# EAGLE board new_encorder_slave 100x50  (EAGLE 6.4)
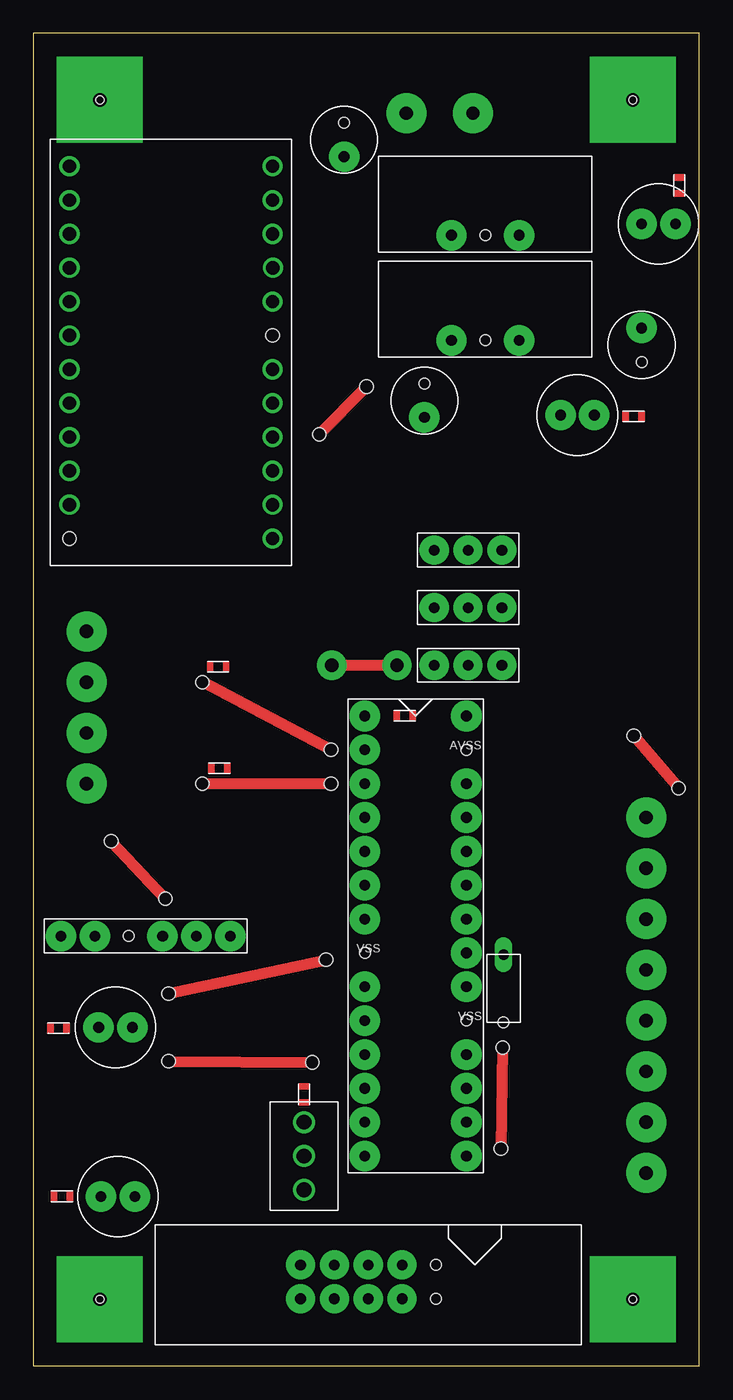
[diagram p0: board, top side]
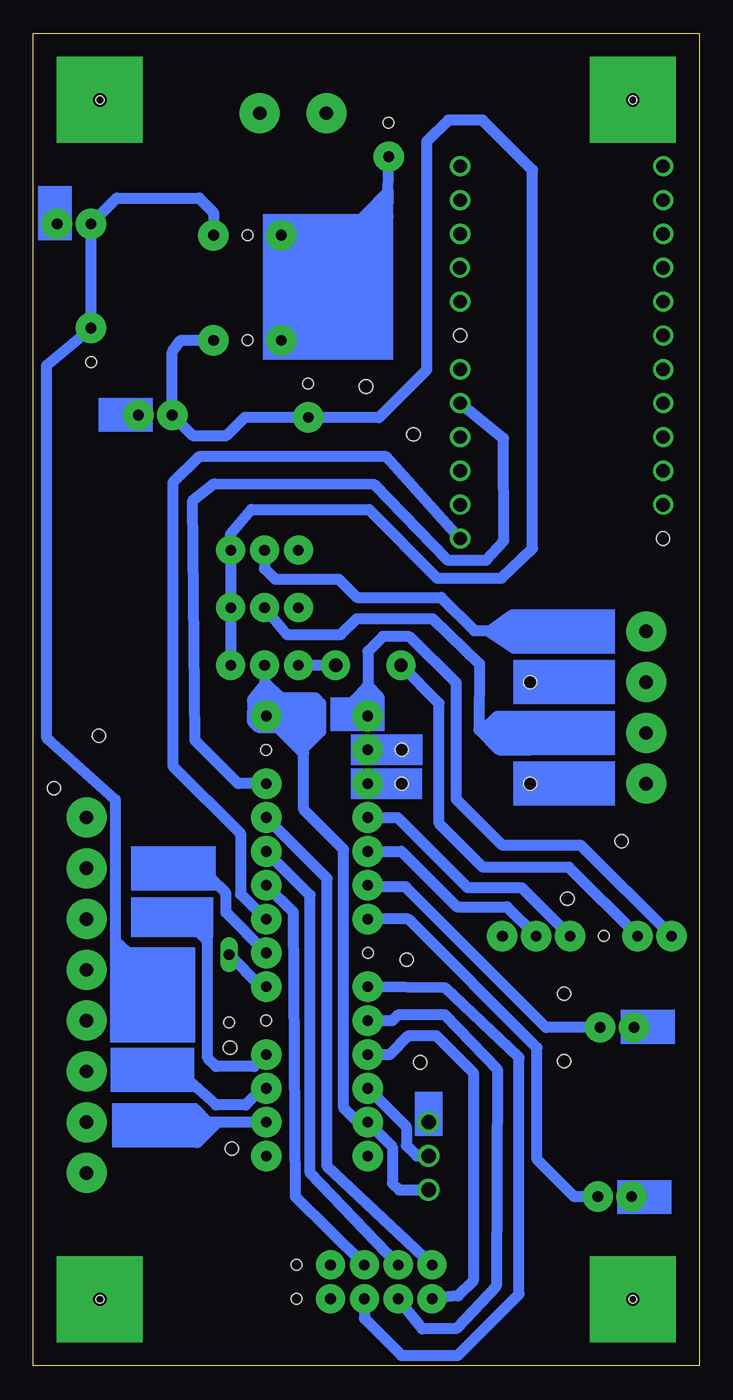
[diagram p1: board, bottom side, seen from below]

Size 50 x 100 mm. Coordinates in mm from the lower left corner, seen from the top.
Outline: 0,0 50,0 50,100 0,100 0,0
Copper layers (1*16): Top 0.035mm / dielectric 1.5mm / Bottom 0.035mm
Design rules "default": minimum track width 10mil, minimum drill 24mil, track to track 8mil, track to pad 8mil, pad to pad 8mil, via to via 8mil, smd to smd 8mil, copper to edge 40mil, drill to drill 8mil, minimum pad ring 10mil, minimum via ring 8mil, stop-mask expansion 4mil, vias tented up to drill 0mil, thermal gap 10mil
Holes 0.6 mm at 5,5 45,5 45,95 5,95
Holes 1 mm at 25.02,73.48 35.1,16.31 10.16,22.86 20.95,22.78 35.23,23.88 9.91,35.05 10.16,27.94 12.7,43.69 21.97,30.48 5.84,39.37 45.09,47.29 12.7,51.31 48.44,43.36 21.46,69.9 22.35,43.69 22.35,46.23

## Footprints (pad centres in the part's own frame; a part is rotated, then mirrored left to right if it is on the bottom)
PIC_28P_2 = drill 0.8 pad 2.3: AVDD 3.81,16.51; MCLR -3.81,16.51; RA0 -3.81,13.97; RA1 -3.81,11.43; RA2 -3.81,-3.81; RA3 -3.81,-6.35; RA4 -3.81,-8.89; RB0 -3.81,8.89; RB1 -3.81,6.35; RB2 -3.81,3.81; RB3 -3.81,1.27; RB4 -3.81,-11.43; RB5 -3.81,-16.51; RB6 3.81,-16.51; RB7 3.81,-13.97; RB8 3.81,-11.43; RB9 3.81,-8.89; RB10 3.81,-1.27; RB11 3.81,1.27; RB12 3.81,3.81; RB13 3.81,6.35; RB14 3.81,8.89; RB15 3.81,11.43; VCAP 3.81,-3.81; VDD -3.81,-13.97 | hole 0.8: -3.81,-1.27; 3.81,-6.35; 3.81,13.97
LED = drill 0.8 pad 2.286: P$1 -1.27,0; P$2 1.27,0
TOGGLE_SWITCH(3PIN) = drill 1.1: P$1 2.54,1.52; P$2 2.54,4.06; P$3 2.54,6.6
AE-UM232R = drill 1: 3LD 16.67,2.03; 3V3 16.67,17.27; CB0 16.67,27.43; CB1 16.67,24.89; CB2 1.43,2.03; CB3 16.67,14.73; CB4 1.43,4.57; CTS# 1.43,7.11; DCD# 1.4,9.65; DSR# 1.43,12.19; DTR# 1.43,27.43; PU1 16.67,12.19; PU2 16.67,9.65; RI# 1.43,17.27; RST 16.67,19.81; RTS# 1.43,24.89; RXD 1.43,19.81; TXD 1.43,29.97; USB 16.67,4.57; VCC 16.67,22.35; VCCC 16.67,7.11; VIO 1.43,22.35 | hole 1: 1.43,14.73; 16.67,29.97
RIBBON_CABLE = drill 0.8 pad 2.184: P$1 -5.08,0; P$2 -2.54,0; P$3 0,0; P$4 2.54,0; P$5 -5.08,-2.54; P$6 -2.54,-2.54; P$7 0,-2.54; P$8 2.54,-2.54 | hole 0.8: 5.08,0; 5.08,-2.54
REGULATOR = drill 0.8 pad 2.286: P$2 -2.54,1.27; P$3 2.54,1.27 | hole 0.8: 0,1.27
WRITER = drill 0.8 pad 2.286: P$1 -6.35,0; P$2 -3.81,0; P$4 1.27,0; P$5 3.81,0; P$6 6.35,0 | hole 0.8: -1.27,0
CAPACITOR_33 = drill 0.8 pad 2.286: P$1 -1.27,0 | hole 0.8: 1.27,0
CAPACITORS_106 = drill 0.8 long: P$2 -2.54,0 | hole 0.8: 2.54,0
3PINSWITCH = drill 0.8 pad 2.184: P$1 -2.54,0; P$2 0,0; P$3 2.54,0

## Placement (x,y rotation side)
DSPIC33FJ128MC1  DSPIC33FJ128MC  [PIC_28P_2]  28.7,32.26 0 top
U$1  LED  [LED]  40.84,71.35 0 top
U$2  LED  [LED]  6.17,25.4 0 top
U$3  LED  [LED]  6.35,12.7 0 top
U$4  LED  [LED]  46.94,85.7 0 top
U$6  TOGGLE_SWITCH(3PIN)  [TOGGLE_SWITCH(3PIN)]  17.78,11.68 0 top
U$7  AE-UM232R  [AE-UM232R]  19.39,92.05 180 top
U$8  RIBBON_CABLE  [RIBBON_CABLE]  25.15,7.57 0 top
U$9  REGULATOR  [REGULATOR]  33.93,83.58 0 top
U$10  REGULATOR  [REGULATOR]  33.93,75.7 0 top
U$11  WRITER  [WRITER]  8.44,32.25 0 top
U$12  CAPACITOR_33  [CAPACITOR_33]  23.33,92.01 90 top
U$13  CAPACITOR_33  [CAPACITOR_33]  45.67,76.61 270 top
U$14  CAPACITOR_33  [CAPACITOR_33]  29.36,72.44 90 top
U$15  CAPACITORS_106  [CAPACITORS_106]  35.31,28.32 270 top
U$16  CHIP_RESISTOR  [CHIP_RESISTOR]  27.88,48.78 0 top
U$17  CHIP_RESISTOR  [CHIP_RESISTOR]  13.97,44.86 0 top
U$18  CHIP_RESISTOR  [CHIP_RESISTOR]  45.07,71.25 0 top
U$19  CHIP_RESISTOR  [CHIP_RESISTOR]  48.5,88.58 90 top
U$20  CHIP_RESISTOR  [CHIP_RESISTOR]  13.87,52.45 180 top
U$21  CHIP_RESISTOR  [CHIP_RESISTOR]  1.89,25.35 0 top
U$22  CHIP_RESISTOR  [CHIP_RESISTOR]  20.32,20.37 90 top
U$23  CHIP_RESISTOR  [CHIP_RESISTOR]  2.16,12.72 0 top
U$24  3PINSWITCH  [3PINSWITCH]  32.64,52.58 0 top
U$25  3PINSWITCH  [3PINSWITCH]  32.64,61.21 0 top
U$26  3PINSWITCH  [3PINSWITCH]  32.64,56.9 0 top

## Library data of the parts
DSPIC33FJ128MC1 = N_MicroComputer
U$1-U$4 U$8-U$26 = oohira_new
U$6 U$7 = inogu

## Nets
N$6: DSPIC33FJ128MC1.RA2 U$8.P$7
N$10: DSPIC33FJ128MC1.AVDD DSPIC33FJ128MC1.VDD U$6.P$1 U$24.P$2
N$14: U$11.P$2
S$1: DSPIC33FJ128MC1.RB9
S$2: DSPIC33FJ128MC1.RB14 U$8.P$1
S$3: DSPIC33FJ128MC1.RB13 U$8.P$2
S$4: DSPIC33FJ128MC1.RB12 U$8.P$3
S$6: DSPIC33FJ128MC1.RB3 U$3.P$2
S$7: DSPIC33FJ128MC1.RB2 U$2.P$2
S$9: DSPIC33FJ128MC1.RB15 U$7.RXD
S$10: DSPIC33FJ128MC1.RB11 U$7.TXD
S$12: DSPIC33FJ128MC1.MCLR U$11.P$1
S$13: DSPIC33FJ128MC1.RB1 U$11.P$5
S$14: DSPIC33FJ128MC1.RB0 U$11.P$4
S$22: U$4.P$1 U$9.P$3 U$13.P$1
S$23: DSPIC33FJ128MC1.RB8
S$24: U$25.P$2
S$27: DSPIC33FJ128MC1.RA4 U$8.P$5
S$28: U$26.P$2
S$29: DSPIC33FJ128MC1.RA3 U$8.P$6
S$36: DSPIC33FJ128MC1.RB7
S$37: DSPIC33FJ128MC1.VCAP U$15.P$2
S$38: U$24.P$1
S$40: DSPIC33FJ128MC1.RB10
S$62: DSPIC33FJ128MC1.RB4 U$6.P$2
S$63: U$9.P$2 U$12.P$1
S$82: U$1.P$1 U$10.P$3 U$14.P$1 U$24.P$3 U$25.P$3 U$26.P$3

## Tracks (layer width: path | path; a pad name or v marks a point on that pad's centre or on a via)
N$6
  Bottom 0.813: U$8.P$7 25.15,3.56 22.38,0.79 18.14,0.79 13.54,5.38 13.54,23.14 19.05,28.36 24.87,28.42 DSPIC33FJ128MC1.RA2
N$10
  Bottom 0.813: DSPIC33FJ128MC1.VDD | DSPIC33FJ128MC1.VDD 23.04,16.43 23.04,13.72 22.53,13.2 U$6.P$1 | DSPIC33FJ128MC1.VDD 25.64,18.29 26.7,19.35 26.7,38.75 29.71,41.76 29.71,45.97 DSPIC33FJ128MC1.AVDD | DSPIC33FJ128MC1.AVDD 31.06,48.77 29.71,50.12 28.83,50.12 28.43,49.72 28.43,47.59 29.85,46.17 29.85,46.96 28.51,48.3 28.51,48.7 29.64,49.83 29.64,48.94 28.84,48.14 29.34,48.14 30.12,48.92 30.6,48.92 31.35,48.17 30.87,48.17 29.88,47.18 29.88,47.96 30.39,48.47 30.39,49.82 28.84,50.13 32.56,50.13 32.33,49.65 30.9,49.65 30.79,49.54 31.43,49.54 32.07,48.9 | U$24.P$2 32.64,48.9 DSPIC33FJ128MC1.AVDD | DSPIC33FJ128MC1.AVDD 32.51,49.13 33.42,50.07 33.53,49.99 32.64,51.14 32.51,51.2 31.5,50.24
N$14
  Bottom 0.813: U$11.P$2 9.79,37.41 16.23,37.41 19.53,40.72 19.53,49.71 22.4,52.58
S$1
  Bottom 0.813: DSPIC33FJ128MC1.RB9 33.42,22.46 36.29,22.46 36.91,23.08 36.91,32.7 37.1,32.89 37.93,32.89 36.96,31.92 36.96,31.87
S$2
  Bottom 0.813: U$8.P$1 27.94,14.96 27.94,36.58 DSPIC33FJ128MC1.RB14
S$3
  Bottom 0.813: U$8.P$2 29.21,14.48 29.21,35.31 DSPIC33FJ128MC1.RB13
S$4
  Bottom 0.813: U$8.P$3 30.33,12.7 30.48,34.04 DSPIC33FJ128MC1.RB12
S$5  (via drill 1 pad 3)
  other vias: 46,18.29
S$6
  Bottom 0.813: U$3.P$2 9.4,12.7 12.19,15.49 12.19,23.88 21.84,33.53 DSPIC33FJ128MC1.RB3
S$7
  Bottom 0.813: U$2.P$2 11.51,25.4 22.05,35.94 24.77,35.94 DSPIC33FJ128MC1.RB2
S$8
  Bottom 0.813: 24.08,48.03 24.03,50.14 24.92,51.08
S$9
  Bottom 0.813: DSPIC33FJ128MC1.RB15 34.62,43.69 37.87,46.94 38.02,64.95 36.42,66.21 24.43,66.17 18.91,60.48 15.99,60.47 14.68,61.9 14.71,69.59 U$7.RXD
S$10
  Bottom 0.813: U$7.TXD 23.5,68.22 37.57,68.22 39.52,66.27 39.52,45.03 34.44,39.95 34.44,35.41 32.56,33.53 DSPIC33FJ128MC1.RB11
S$12
  Bottom 0.813: U$11.P$1 8.9,39.06 14.78,39.06 18.24,42.52 18.24,51.26 21.77,54.72 23.76,54.74 24.89,53.62 DSPIC33FJ128MC1.MCLR
S$13
  Bottom 0.813: DSPIC33FJ128MC1.RB1 22.38,38.61 18.21,34.44 14.44,34.44 U$11.P$5
S$14
  Bottom 0.813: DSPIC33FJ128MC1.RB0 22.66,41.15 17.4,35.89 13.34,35.89 U$11.P$4
S$15  (via drill 1 pad 6.45)
  other vias: 5,95
S$16  (via drill 1 pad 6.45)
  other vias: 45,95
S$17  (via drill 1 pad 6.45)
  other vias: 5,5
S$18  (via drill 1 pad 6.45)
  other vias: 45,5
S$19
  Top 0.813: 22.35,46.23 12.7,51.31
S$20  (via drill 1 pad 3)
  other vias: 28,94
S$21  (via drill 1 pad 3)
  other vias: 33,94
S$22
  Bottom 0.813: 43.74,24.69 43.82,31.87 39.8,28.17 39.8,27.23 43.84,31.27 43.84,42.49 49.02,47.17 49.02,75.06 U$13.P$1 U$4.P$1 43.74,87.63 37.54,87.63 36.47,86.56 U$9.P$3
S$23
  Bottom 0.813: 38.6,21.66 36.28,19.57 34.05,19.57 32.79,20.83 DSPIC33FJ128MC1.RB8
S$24
  Bottom 0.813: U$25.P$2 32.64,59.83 31.85,59.04 27.08,59.04 25.71,57.67 19.39,57.67 16.9,55.18 15.23,55.18 15.08,55.03
S$25  (via drill 1 pad 2.18)
  other vias: 22.4,52.58 27.3,52.58
S$26
  Top 0.813: 12.7,43.69 22.35,43.69
S$27
  Bottom 0.813: DSPIC33FJ128MC1.RA4 23.24,23.37 21.82,24.79 19.76,24.79 16.97,22 16.97,6.38 18.11,5.24 20.02,5.08 U$8.P$5
S$28
  Bottom 0.813: U$26.P$2 30.93,54.86 26.92,54.86 25.7,56.07 20.03,56.08 16.5,52.67 16.56,47.75 15.04,46.23 12.7,46.23 13.64,47.17 13.64,48.77 13.66,48.74 15.19,48.74 16.23,47.7 16.23,47.47 15.6,46.84 13.06,46.84 13.64,47.42 15.6,47.42 14.99,48.03 13.82,48.03
S$29
  Bottom 0.813: DSPIC33FJ128MC1.RA3 23.04,25.91 22.58,26.36 19.13,26.36 15.16,22.26 15.24,5.98 18.24,2.79 20.79,2.77 U$8.P$6
S$30
  Bottom 0.813: 14.07,56.34 14.05,56.36 13.92,56.03 14.07,56.34 | 14.07,56.34 13.95,53.85 15.8,55.11 | 14.07,56.34 15.8,55.11 | 15.8,55.11 14.17,55.42 13.99,55.6 14.61,55.6 14.71,55.5 14.71,55.02 14.53,54.84
S$31
  Bottom 0.813: 33.54,49.96 33.56,48.36 33.11,47.91 31.52,47.91 31.25,48.18 31.25,48.31 33.13,50.19
S$32
  Bottom 0.813: 32.96,49.59 32.85,49.59 32.85,48.28
S$33
  Top 0.813: 10.16,27.94 21.97,30.48
S$34
  Top 0.813: 10.16,22.86 20.95,22.78
S$36
  Bottom 0.813: 37.67,17.86 37.26,18.26 36.17,18.26 37.67,16.76 37.74,16.76 37.87,16.89 37.87,19.28 36.88,18.29 DSPIC33FJ128MC1.RB7
S$37
  Bottom 0.813: DSPIC33FJ128MC1.VCAP 32.89,28.45 U$15.P$2
S$38
  Bottom 0.813: U$24.P$1 27.3,52.58
S$39
  Top 0.813: 22.4,52.58 27.3,52.58
S$40
  Bottom 0.813: 36.91,36.63 36.68,36.63 35.53,35.48 35.53,34.01 DSPIC33FJ128MC1.RB10
S$42  (via drill 1 pad 3)
  other vias: 46,41.15
S$43  (via drill 1 pad 3)
  other vias: 46,37.34
S$44  (via drill 1 pad 3)
  other vias: 46,33.53
S$45  (via drill 1 pad 3)
  other vias: 46,29.72
S$46  (via drill 1 pad 3)
  other vias: 46,25.91
S$47  (via drill 1 pad 3)
  other vias: 46,22.1
S$48  (via drill 1 pad 3)
  other vias: 46,14.48
S$52  (via drill 1 pad 3)
  other vias: 4,43.69
S$53  (via drill 1 pad 3)
  other vias: 4,47.5
S$54  (via drill 1 pad 3)
  other vias: 4,51.31
S$55  (via drill 1 pad 3)
  other vias: 4,55.12
S$58
  Top 0.813: 21.46,69.9 25.02,73.48
S$60
  Bottom 0.813: 23.37,88.16 23.37,87.33 | 23.37,87.33 24.18,86.51 | 23.37,88.01 25.15,86.23 23.37,86.26 23.37,87.33
S$62
  Bottom 0.813: DSPIC33FJ128MC1.RB4 22,17.93 22,16.54 21.2,15.74 U$6.P$2
S$63
  Bottom 0.813: U$9.P$2 26.58,84.85 23.37,88.11 23.32,90.73 U$12.P$1
S$64
  Top 0.813: 35.23,23.88 35.1,16.31
S$82
  Bottom 0.813: U$24.P$3 U$26.P$3 U$25.P$3 35.18,62.46 33.65,64.28 24.8,64.27 19.7,59.1 14.86,59.11 12.52,61.34 12.52,89.74 16.28,93.5 18.85,93.5 20.47,91.87 20.47,74.73 24.05,71.14 27.2,71.17 U$14.P$1 34.14,71.17 35.53,69.77 38,69.77 U$1.P$1 39.57,76.1 38.94,76.96 U$10.P$3
S$86
  Bottom 0.813: 24.87,51.03 24.87,51 26.01,49.86
S$87
  Top 0.813: 45.09,47.3 48.44,43.36
S$88
  Top 0.813: 5.84,39.37 9.91,35.05
(copper drawn outside any net)
  shapes: Bottom area x18